# Altium PCB TMC2100 V1.3.PcbDoc
Units mil, origin at the board's own origin, x right, y up, seen from the top; angles counter-clockwise.
Board outline 600 x 800 mil, 4 copper layers (Top, Ground, Supply, Bottom), stack 62.992 mil thick; 20 components, 27 nets, 91 pads, 68 vias.
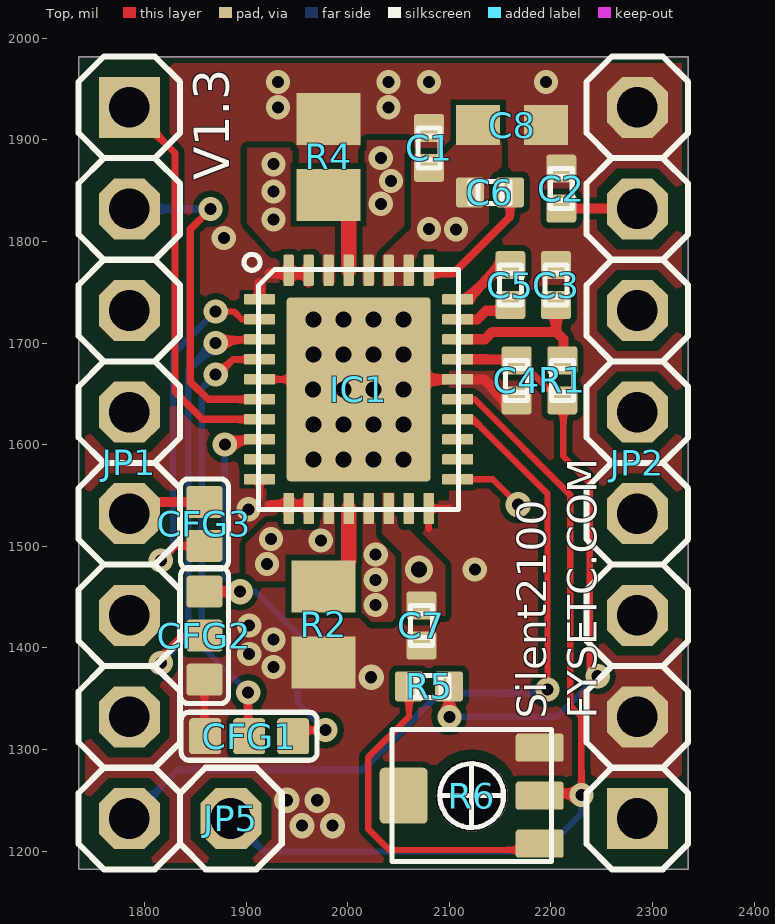
[diagram p0: Top view]
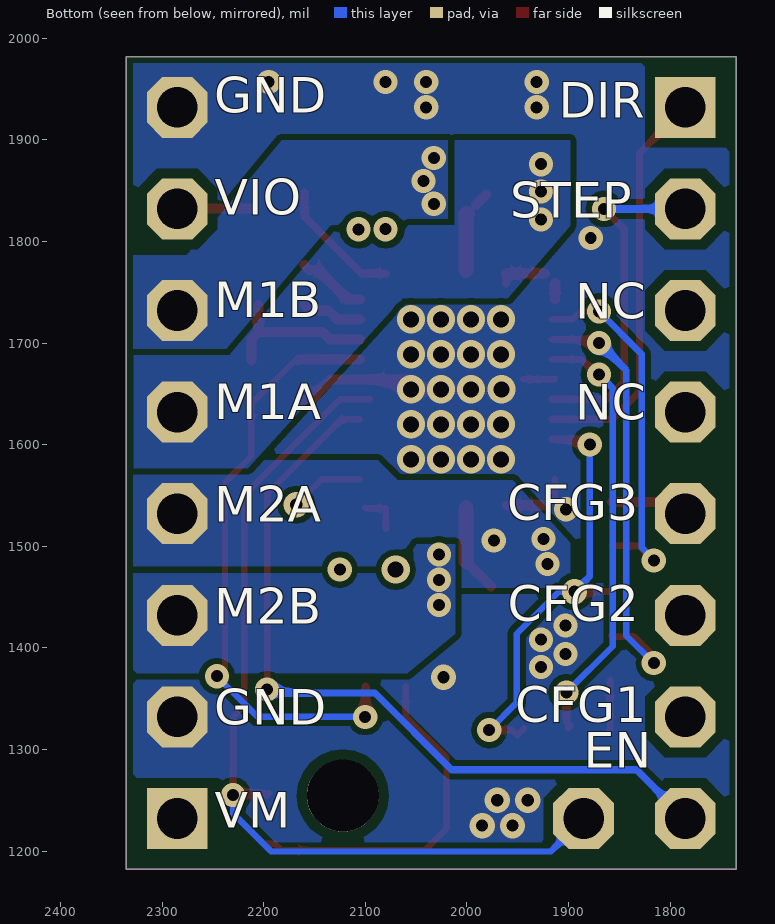
[diagram p1: Bottom view, seen from below]
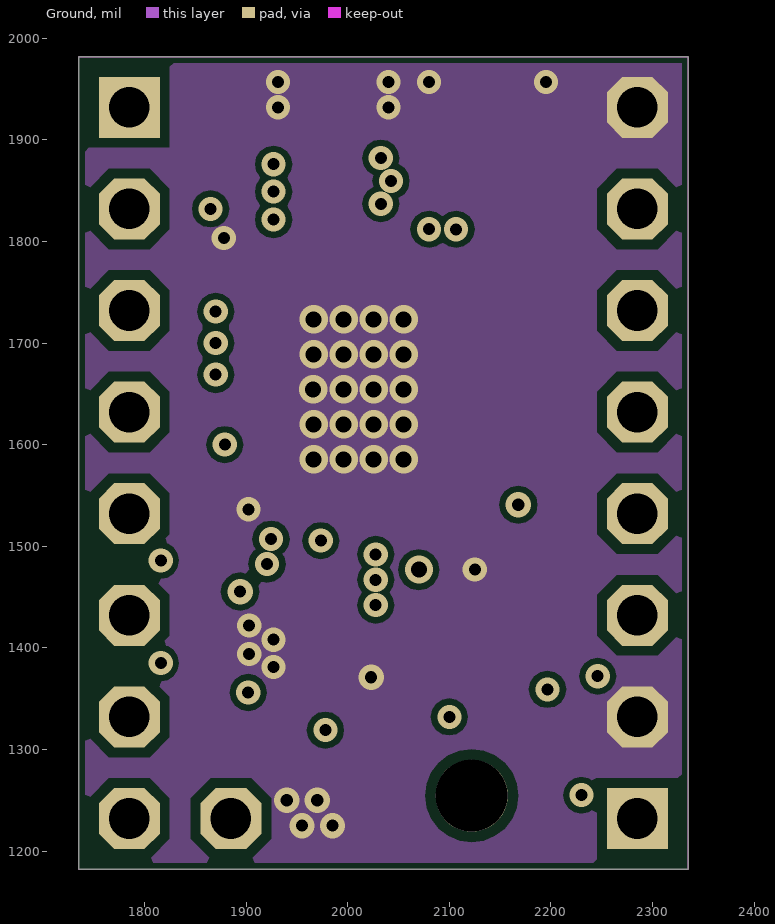
[diagram p2: Ground]
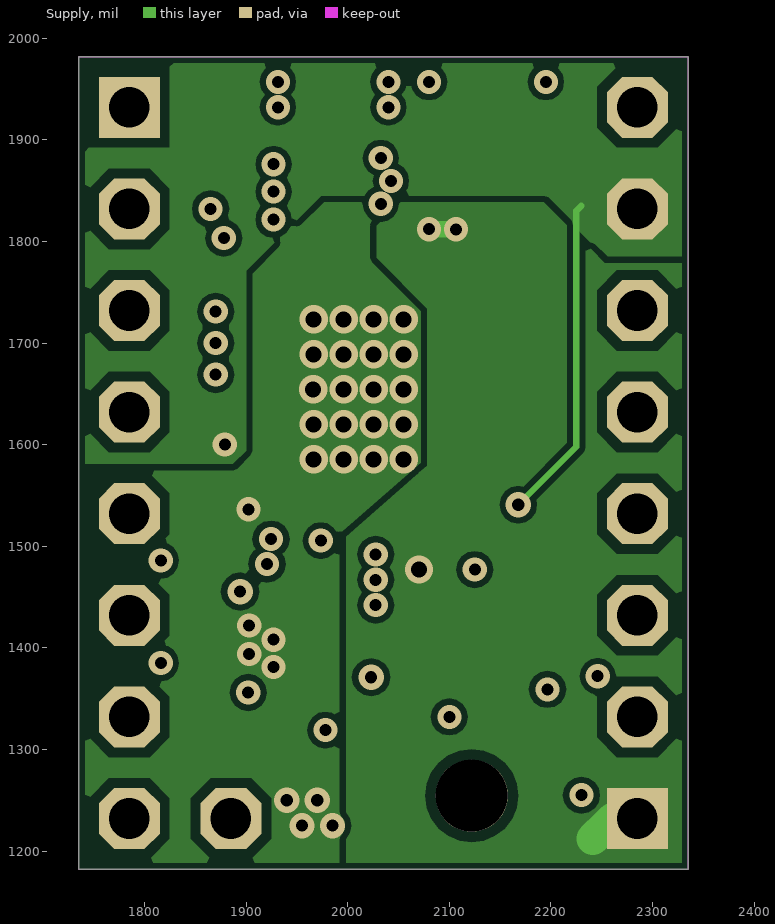
[diagram p3: Supply]

## Layer stack, top to bottom
Top Solder: solder mask 0.4, Solder Resist, Dk 3.5
Top: signal copper 1.378
Dielectric 1: prepreg 13.7795, FR-4, Dk 4.8
Ground: signal copper 1.378
Dielectric 2: core 13.7795, FR-4, Dk 4.8
Supply: signal copper 1.378
Dielectric 3: prepreg 29.9213, FR-4, Dk 4.8
Bottom: signal copper 1.378
Bottom Solder: solder mask 0.4, Solder Resist, Dk 3.5

## Board outline
1735,1182 2335,1182 2335,1982 1735,1982

## Design rules (kind name [scope] priority, off if disabled: settings)
Clearance [All] p1: gap=6 except(10: THPad-Poly)
Clearance "Clearance (Same Net)" [All] p2: gap=0
HoleSize HoleSize_1 [All] p1: absolutevalues=TRUE maxlimit=100000 minlimit=9.84 maxpercent=80.000 minpercent=20.000
HoleSize [All] p2: absolutevalues=TRUE maxlimit=100 minlimit=1 maxpercent=80.000 minpercent=20.000
HoleToHoleClearance mdViaViaSameLayer [All] p1: gap=8 allowstackedmicrovias=TRUE
HoleToHoleClearance [All] p2: gap=10 allowstackedmicrovias=TRUE
PasteMaskExpansion mlMinCreamFrame [All] p1: expansion=0
PasteMaskExpansion [All] p2: expansion=0
PolygonConnect ThermalVias [IsVia] p1: connectstyle=Direct reliefconductorwidth=10 reliefentries=4 polygonreliefangle="90 Angle" airgapwidth=10
PolygonConnect [All] p2: connectstyle=Direct reliefconductorwidth=10 reliefentries=4 polygonreliefangle="90 Angle" airgapwidth=10
RoutingVias [All] p1: holewidth=12 width=25 viastyle="Through Hole" minholewidth=10 minwidth=20 maxholewidth=28 maxwidth=50
SilkToSilkClearance [All] p1 off: silktosilkclearance=10
SilkToSolderMaskClearance [IsPad] p1 off: minsilkscreentomaskgap=10 clearancetoexposedcopper=TRUE
SolderMaskExpansion mlMinStopFrame [All] p1: expansion=2
SolderMaskExpansion [All] p2: expansion=4
Width Width_1 [All] p1: maxlimit=100000 minlimit=5.91 preferedwidth=10
Width [All] p2: maxlimit=10 minlimit=10 preferedwidth=10
25 further rules are at their usual default settings.

## Components (designator, comment, footprint, x,y, rotation, side; value= is the part's Value field where it differs from the comment)
C1 "100n/50V" C0402 2080,1892 r180 top
C2 "100n/50V" C0402 2210.17,1852 r0 top
C3 "470n/10V" C0402 2205,1757 r0 top
C4 "4u7/10V" C0402 2166.25,1663.25 r180 top
C5 "22n/50V" C0402 2160,1757 r180 top
C6 "100n/50V" C0402 2140,1848.25 r90 top
C7 "100n/50V" C0402 2072.5,1422 r0 top
C8 "" C0603 2161.85,1914.43 r0 top
CFG1 "" JUMPER3-0402 1903,1313 r90 top
CFG2 "" JUMPER3-0402 1859,1412 r180 top
CFG3 "" JUMPER2-0402 1859,1522 r180 top
IC1 "TMC2100-LA" WE-CHIP_QFN36-PAD 2010.75,1654.44 r0 top
JP1 "" 1X08-S 1785,1582 r270 top
JP2 "" 1X08-S 2285,1582 r90 top
JP5 "" 1X01 1885,1232 r0 top
R1 "2R2" C0402 2211.17,1663.25 r0 top
R2 "" M0805 1976.14,1423.06 r90 top
R4 "" M0805 1981.06,1883.28 r270 top
R5 "20k" C0402 2080,1362 r90 top
R6 "20k" POT_EVM3R 2122,1254.5 r90 top

## Footprints (in the part's own frame and the unit in brackets; to place one, negate y for a bottom-side part, rotate by r counter-clockwise, add the part's x,y. Pads: shape width x height; smd on the part's side, far side on the other; paste and mask are expansions set on the pad)
1X01 [mil] "1X01"
  oct 60x60 hole 40: 1(0,0)
  silkscreen extent -50,-50 50,50
1X08-S [mil] "1X08-S"
  rect 60x60 hole 40: 1(-350,0)
  oct 60x60 hole 40: 2(-250,0) 3(-150,0) 4(-50,0) 5(50,0) 6(150,0) 7(250,0) 8(350,0)
  silkscreen extent -400,-50 400,50
C0402 [mil] "C0402"
  rrect20% 29.53x27.56 smd: 1(0,19.69) 2(0,-19.69)
  silkscreen extent -11,-20 11,20
C0603 [mm] "C0603"
  rect 1.1x1 smd: 1(-0.85,0) 2(0.85,0)
JUMPER2-0402 [mil] "JUMPER2-0402"
  rrect20% 35.43x31.5 smd: 1(0,21.65) 2(0,-21.65)
  silkscreen extent -24,-44 24,44
JUMPER3-0402 [mil] "JUMPER3-0402"
  rrect20% 35.43x31.5 smd: 1(0,43.31) 2(0,0) 3(0,-43.31)
  silkscreen extent -24,-67 24,67
M0805 [mil] "M0805"
  rect 51.18x62.99 smd: 1(-37.4,0) 2(37.4,0)
POT_EVM3R [mil] "POT_EVM3R"
  rrect20% 27.56x47.24 smd: 1(-47.24,-66.93) 2(0,-66.93) 3(47.24,-66.93)
  round 70.87 hole 70.87: 1(0,0)
  rrect20% 55.12x47.24 smd: MOUNT(0,66.93)
  silkscreen extent -65,-78 65,78
WE-CHIP_QFN36-PAD [mil]
  rrect20% 30.56x10.24 smd: 1(-97.49,88.58) 2(-97.49,68.9) 3(-97.49,49.21) 4(-97.49,29.53) 5(-97.49,9.84) 6(-97.49,-9.84) 7(-97.49,-29.53) 8(-97.49,-49.21) 9(-97.49,-68.9) 10(-97.49,-88.58) 19(97.49,-88.58) 20(97.49,-68.9) 21(97.49,-49.21) 22(97.49,-29.53) 23(97.49,-9.84) 24(97.49,9.84) 25(97.49,29.53) 26(97.49,49.21) 27(97.49,68.9) 28(97.49,88.58)
  rrect20% 10.24x30.56 smd: 11(-68.9,-117.17) 12(-49.21,-117.17) 13(-29.53,-117.17) 14(-9.84,-117.17) 15(9.84,-117.17) 16(29.53,-117.17) 17(49.21,-117.17) 18(68.9,-117.17) 29(68.9,117.17) 30(49.21,117.17) 31(29.53,117.17) 32(9.84,117.17) 33(-9.84,117.17) 34(-29.53,117.17) 35(-49.21,117.17) 36(-68.9,117.17)
  rrect5% 141.74x181.1 smd: TP(0,0)
  silkscreen extent -113,-118 98,133

## Part data
C1 C2 C3 C4 C5 C6 C7 R1 R5: library part C0402
C8: library part C0603
CFG1 CFG2: library part JUMPER3-0402
CFG3: library part JUMPER2-0402
IC1: library part QFN36-PAD
JP1 JP2: library part 1X08-S
JP5: library part 1X01
R2 R4: library part M0805
R6: library part POT_EVM3R

## Via types
v1: diameter 23.81/23.81/23.81/23.81 (per signal layer), hole 11.81, Top to Bottom, tented both sides, 40 vias
v2: diameter 27.75/27.75/27.75/27.75 (per signal layer), hole 15.75, Top to Bottom, 20 vias
v3: diameter 25, hole 12, Top to Bottom, tented both sides, 7 vias
v4: diameter 27.75/27.75/27.75/27.75 (per signal layer), hole 15.75, Top to Bottom, tented both sides, 1 vias

## Nets (pads, with @x,y where several pads share a name; then routed paths per layer and width w, separated by ;. In a path a pad name is that pad's centre, name@x,y a point inside that pad or via, vN(x,y) a via of type N, cw(c..) or ccw(c..) an arc to the next point about the centre after c; other vN are vias at no path point)
+5V: C4.2 IC1.25 R1.2 R5.2 | length 592.1
  Top w6.3: C4.2 2167.19,1682 2170,1682 2208.44,1643.57 2212.17,1643.57 2212.17,1588.58 2238,1562.75 2238,1380.04 v1(2246,1372.04)
  Top w7.87: v1@2099.69,1341.69 R5.2
  Top w9.84: IC1.25@2105.24,1683.97 2165.22,1683.97 C4.2
  Bottom w6.3: v1(2100,1332) 2205.96,1332 v1(2246,1372.04)
BRA: IC1.33 R4.2 | length 69.6
  Top w10: R4.2 R4.2@1990.91,1836.04
  Top w15: IC1.33 R4.2@2000.91,1826.03
  Top w16: R4.2@2000,1826.94 R4.2@2000.91,1826.03
BRB: IC1.14 R2.2 | length 90.1
  Top w10: R2.2 R2.2@2000.91,1485.23 ; IC1.14 IC1.14@2000.91,1540.27
  Top w15: R2.2@2000.91,1485.23 IC1.14
CFG1: CFG1.2 IC1.4 | length 428.9
  Top w6.3: v1@1877,1666 1877,1674 1886.97,1683.97 IC1.4@1916.26,1683.97 ; CFG1.2@1900,1321 1898,1323 1902,1327 v1(1902,1356)
  Top w10: v1(1902,1356) v1@1903,1355
  Bottom w6.3: v1(1870,1669) 1856.3,1655.3 1856.3,1401.7 v1(1902,1356) ; v1@1876,1666 v1@1877,1666
CFG2: CFG2.2 IC1.3 | length 433.1
  Top w6.3: v1(1816,1385) 1816,1392 1835,1411 1856.75,1411 CFG2.2@1857.75,1412 ; v1@1877.65,1703.65 IC1.3@1916.26,1703.65
  Bottom w6.3: v1(1816,1385) 1843,1412 1843,1673.19 1869.81,1700 v1(1870,1700)
CFG3: CFG3.1 IC1.2 | length 363.9
  Top w6.3: v1(1816,1486) 1830.35,1500.35 CFG3.1@1857,1500.35 ; v1(1870,1731) 1888,1731 1895.66,1723.34 IC1.2@1916.26,1723.34
  Bottom w6.3: v1(1816,1486) 1816,1487 1828,1499 1828,1689.19 1869.81,1731 v1(1870,1731)
CFG6: IC1.22 JP1.8 | length 778.5
  Top w6.3: IC1.22@2105.24,1624.91 2123.34,1624.91 2196.58,1551.67 v1(2196.58,1359.08)
  Bottom w7.09: JP1.8 1833,1280 2015,1280 2090.5,1355.5 2193,1355.5 v1(2196.58,1359.08)
CFG-1: JP1.7
CFG-2: JP1.6
CFG-3: CFG3.2 JP1.5 | length 76.8
  Top w10: JP1.5 1796.65,1543.65 CFG3.2@1857,1543.65
CPI: C5.2 IC1.28 | length 68.7
  Top w7.09: C5.2@2153.35,1772 C5.2@2155.32,1772
  Top w9.84: IC1.28@2105.24,1743.02 2117.27,1743.02 2146.25,1772 C5.2@2153.35,1772 ; C5.2@2155.32,1772 C5.2
CPO: C5.1 IC1.27 | length 60.6
  Top w9.84: IC1.27@2105.24,1723.34 2127.59,1723.34 2136.25,1732 2154.69,1732 C5.1
DIAG0: IC1.20
DIAG1: IC1.21
DIR: IC1.7 JP1.1 | length 396.1
  Top w7.09: JP1.1 1830,1887 1830,1652 1857.09,1624.91 IC1.7@1916.26,1624.91
GND: C1.2 C2.1 C3.1 C4.1 C7.2 C8.2 CFG1.1 CFG2.1 IC1.1 IC1.5 IC1.10 IC1.11 IC1.12 IC1.18 IC1.24 IC1.35 IC1.36 IC1.TP JP2.2 JP2.8 R2.1 R4.1 R6.3 | length 417.4
  Top w6.3: CFG2.1 1859,1319.69 CFG1.1@1859.69,1319 ; 1913,1548 1913.26,1548.26 IC1.10 ; IC1.5 IC1.TP@1945,1664.28 ; 2079.65,1517.31 IC1.18 2099.27,1537.27 2100,1538
  Top w7.09: IC1.12@1960.63,1540.27 IC1.12@1961.54,1541.17
  Top w7.87: IC1.35@1961.54,1758.77 IC1.35@1961.54,1768.61 ; IC1.TP v2(2055.04,1654.44)
  Top w9.84: 1923.1,1540.27 IC1.12@1960.63,1540.27 ; 1923.1,1768.61 IC1.35@1961.54,1768.61 ; v2(2055.04,1654.44) 2055.04,1664.28 2133.97,1664.28 2153.75,1644.5 2165.32,1644.5 C4.1
  Top w10: 1913,1759 1913.26,1758.74 IC1.1
  other v1: 1927,1381 1903,1394 1927,1408 1903,1422 2125,1477 1902.32,1536.33 1878.03,1803.32 1931.25,1932 2040,1932 1931.25,1957 2040,1957 2080,1957 2195,1957
  other v2: 1966.46,1585.54 1995.98,1585.54 2025.51,1585.54 2055.04,1585.54 1966.46,1619.99 1995.98,1619.99 2025.51,1619.99 2055.04,1619.99 1965.98,1654.44 1995.98,1654.44 2025.51,1654.44 1966.46,1688.89 1995.98,1688.89 2025.51,1688.89 2055.04,1688.89 1966.46,1723.34 1995.98,1723.34 2025.51,1723.34 2055.04,1723.34
  other v3: 1955,1225 1985,1225 1940,1250 1970,1250 2023,1371
IREF: IC1.23 JP5.1 R6.2 | length 896.9
  Top w6.3: IC1.23@2095.33,1644.5 IC1.23@2105.33,1644.5 ; IC1.23@2107.5,1644.5 IC1.23@2105.33,1644.5 ; R6.2@2194.43,1257 R6.2@2196.93,1254.5 ; R6.2@2198.43,1256 R6.2@2196.93,1254.5 ; R6.2@2199.43,1257 R6.2@2196.93,1254.5 ; v1@2230,1257 2230,1332 2219,1343 2219,1550.5 2124.9,1644.6 2105.24,1644.6 IC1.23@2105.33,1644.5
  Top w7.09: R6.2@2199.43,1257 v1@2230,1257
  Bottom w6.3: JP5.1 1917.5,1199.5 2192.5,1199.5 2230,1237 v1@2230,1257
  other v1: 2230,1255
OA1: IC1.34 JP2.5
  other v1: 1927.01,1821.49 1927.01,1848.99 1927.01,1875.98
OA2: IC1.32 JP2.6
  other v1: 2032.54,1837 2042.5,1859.5 2032.54,1882
OB1: IC1.13 JP2.4
  other v1: 1920.5,1482.5 1973.5,1505.5 1924.5,1507
OB2: IC1.15 JP2.3
  other v1: 2027.5,1442 2027.5,1467 2027.5,1492
STEP: IC1.6 JP1.2 | length 336.8
  Top w7.09: v1(1865,1832) 1845,1812 1845,1662 1862.4,1644.6 IC1.6@1916.26,1644.6
  Bottom w7.87: JP1.2 v1(1865,1832)
VCC: C3.2 IC1.26 R1.1 | length 160.2
  Top w9.84: IC1.26@2105.24,1703.65 2134.95,1703.65 2142.33,1711.04 2204.98,1711.04 ; C3.2 2205,1711.06 ; R1.1@2212.17,1682.94 2212.17,1703.85 2204.98,1711.04
VCP: C6.2 IC1.29 | length 127.1
  Top w7.87: IC1.29@2079.65,1768.61 2104.11,1768.61 2159.69,1824.19 C6.2
VIO: C2.2 CFG1.3 CFG2.3 IC1.8 IC1.19 JP2.7 | length 909.6
  Top w6.3: CFG2.3 v3(1894,1455.31) ; CFG1.3@1943.31,1321 1950.31,1314 1955.31,1319 v1(1978,1319) ; IC1.19@2105.24,1565.86 2142.86,1565.86 v3(2167.86,1540.86)
  Top w7.09: v1@1878.23,1605.23 IC1.8@1916.26,1605.23
  Top w9.84: C2.2@2212.17,1832.32 2284.69,1832.32 JP2.7
  Supply w6.3: v3(2167.86,1540.86) 2225,1598 2225,1830 2230,1835
  Bottom w6.3: v1(1879,1600) 1879,1470.31 v3(1894,1455.31) 1909.47,1455.31 1950.78,1414 1950.78,1346.22 v1(1978,1319)
VM: C1.1 C6.1 C7.1 C8.1 IC1.16 IC1.30 IC1.31 JP2.1 | length 54.9
  Supply w16: v1(2080,1812) 2106.48,1812 v1(2106.56,1811.92)
  Supply w32: 2241.25,1212 JP2.1@2261.25,1232
  other v4: 2070,1477
VREF1: R5.1 R6.1@2188.93,1207.26 | length 344.9
  Top w6.3: R5.1 2060.31,1332.31 2020,1292 2020,1222 2041,1201 2182.67,1201 2188.93,1207.26 R6.1@2196.93,1207.26
pads on no net: IC1.9 IC1.17 JP1.3 JP1.4 R6.1@2122,1254.5 R6.MOUNT

## Polygon pours and split planes (outlines as drawn)
VM on Top "Top-VM" (solid, remove dead copper, pour order 0): 2033.85,1756.36 2033.84,1785.68 2062.32,1812.77 2062.32,1885.93 2095.87,1885.93 2114.94,1905 2144,1905 2151.43,1897.56 2151.43,1874.12 2138.93,1861.62 2138.93,1811.62 2117.88,1790.57 2074.13,1790.57 2065.53,1781.96 2065.53,1756.36
VM on Top "Top-VM 1" (solid, remove dead copper, pour order 2): 2033.85,1552.53 2033.85,1512.44 2053.26,1493.03 2053.26,1431.51 2095.72,1431.51 2095.72,1481.21 2046.47,1530.54 2046.47,1552.53
GND on Top "Top-GND 1" (solid, remove dead copper, pour order 12): 1931.07,1973.43 1931.07,1903.07 2017.88,1903.07 2032.68,1917.87 2032.68,1973.43
GND on Top "Top-GND 2" (solid, remove dead copper, pour order 14): 1928.57,1345.57 2061.41,1345.57 2061.89,1414.97 2025.09,1414.97 2011.63,1428.43 1928.57,1428.43
OA1 on Top "Top-OA1" (solid, remove dead copper, pour order 18): 1987.49,1756.36 1987.49,1820.78 1945.55,1820.78 1945.55,1892.13 1900.88,1892.13 1900.88,1817.73 1928.82,1787.13 1974.87,1787.13 1974.87,1756.36
OA2 on Top "Top-OA2" (solid, remove dead copper, pour order 22): 2058.81,1813.14 2058.82,1899.52 2016.58,1899.52 2016.58,1820.92 2014.32,1821 2014.32,1754.47 2026.43,1759.34 2026.43,1782.35
OB2 on Top "Top-OB2" (solid, remove dead copper, pour order 26): 2053.72,1425.45 2053.94,1496.12 2026.23,1523.83 2026.23,1552.53 2014.47,1552.53 2014.47,1522.04 2008.6,1516.16 2006.9,1425.45
OB1 on Top "Top-OB1" (solid, remove dead copper, pour order 30): 1988.93,1465.57 1988.93,1554.68 1974.82,1554.68 1974.82,1527.38 1970.87,1523.43 1920.87,1523.43 1899.82,1502.38 1899.82,1465.57
GND on Top "Keep-Out Layer-No Net" (solid, remove dead copper, pour order 44): 2335,1182 1735,1182 1735,1982 2335,1982
VM on Supply "Supply-VM" (solid, remove dead copper, pour order 4): 2335,1182 1998.31,1182 1998.31,1509.4 2078.31,1579.4 2078.31,1733.96 2028.31,1783.96 2028.31,1838.69 2193.04,1838.69 2253.04,1778.69 2335,1778.69
VIO on Supply "Keep-Out Layer-No Net" (solid, remove dead copper, pour order 36): 1735,1982 1735,1581 1887,1581 1899,1593 1900,1594 1900,1771 1974,1845 2193,1845 2260,1778 2335,1778 2335,1982
GND on Supply "Keep-Out Layer-No Net" (solid, remove dead copper, pour order 38): 1927.01,1848.99 1900,1821.98 1900,1796.36 1900,1594 1887,1581 1886,1580 1735,1580 1735,1182 1736,1181 1999,1181 1999,1509.44 2003.56,1514 2078.31,1588.75 2078.31,1733.96 2028.31,1783.96 2028,1784.27 2028,1849
OA1 on Bottom "Bottom-OA1" (solid, remove dead copper, pour order 20): 2215.54,1576.68 2339.32,1576.68 2339.32,1687.9 2233.88,1687.9 2125.61,1815.86 2012.07,1815.86 2012.07,1899.52 1898.38,1899.52 1898.38,1815.38 1959.49,1744.09 2062.91,1744.09
OA2 on Bottom "Bottom-OA2" (solid, remove dead copper, pour order 24): 2339.32,1689.88 2230.27,1689.88 2122,1812.9 2011.58,1812.9 2011.58,1899.67 2182.07,1899.67 2275.73,1786.33 2339.32,1786.33
OB2 on Bottom "Bottom-OB2" (solid, remove dead copper, pour order 28): 2339.32,1473.63 2339.32,1374.83 2058.46,1374.92 2011.58,1413.91 2011.58,1502.14 2053.05,1502.19 ccw(c2192.25,1487.64) 2052.99,1473.63
OB1 on Bottom "Bottom-OB1" (solid, remove dead copper, pour order 32): 2339.43,1584.56 2336.73,1478.18 2062.22,1478.18 2059.95,1497.94 2014.53,1497.94 2014.53,1459.2 1898.38,1459.2 1898.38,1503.41 1954.65,1564.8 2067.94,1564.8 2087.7,1584.56
GND on Bottom "Keep-Out Layer-No Net" (solid, remove dead copper, pour order 40): 1735,1982 1735,1182 2335,1182 2335,1982
GND on Ground "Keep-Out Layer-No Net" (solid, remove dead copper, pour order 42): 2335,1182 1735,1182 1735,1982 2335,1982

## Keep-outs
Keep-Out Layer:
  the board outline again, w0

## Other copper
Top:
  pour cut-out: 1920,1759.34 1920,1545 2100,1545 2100,1759.34
  pour cut-out: 1893.3,1752.22 1893.3,1733.82 1933.26,1733.82 1933.26,1752.22
  pour cut-out: 1970.74,1788.57 1952.34,1788.57 1952.34,1748.61 1970.74,1748.61
  pour cut-out: 1951.05,1788.57 1932.65,1788.57 1932.65,1748.61 1951.05,1748.61
  pour cut-out: 1933.22,1556.66 1933.22,1575.06 1893.26,1575.06 1893.26,1556.66
  pour cut-out: 1932.65,1517.31 1951.05,1517.31 1951.05,1557.27 1932.65,1557.27
  pour cut-out: 1952.34,1517.31 1970.74,1517.31 1970.74,1557.27 1952.34,1557.27
  pour cut-out: 2070.45,1517.31 2088.85,1517.31 2088.85,1557.27 2070.45,1557.27
  pour cut-out: 2363.8,1551.04 2382.2,1551.04 2382.2,1591 2363.8,1591

## Silkscreen, mask and mechanical layers (free items; w line width, h text height)
Top Overlay:
  text "V1.3" at 1895,1860 h60 r90
  text "Silent2100 / FYSETC.COM" at 2255,1330 h50 r90
Bottom Overlay:
  text "GND" at 2248.38,1915 h60
  text "DIR" at 1909.44,1910 h60
  text "VIO" at 2248.32,1814.54 h60
  text "STEP" at 1957.39,1811.38 h60
  text "M1B" at 2248.38,1713.42 h60
  text "NC" at 1893.23,1712.09 h60
  text "NC" at 1893.23,1612.81 h60
  text "M1A" at 2248.38,1612.96 h60
  text "CFG3" at 1960,1513.52 h60
  text "M2A" at 2248.38,1512.5 h60
  text "CFG2" at 1959.61,1414.24 h60
  text "M2B" at 2248.38,1412.05 h60
  text "CFG1" at 1952.56,1314.95 h60
  text "GND" at 2248.38,1312.25 h60
  text "EN" at 1885,1270 h60
  text "VM" at 2248.32,1211.13 h60
Bottom Solder:
  region: 1961,1737 ccw(c1961,1727) 1951,1727 1951,1582 ccw(c1961,1582) 1961,1572 2061,1572 ccw(c2061,1582) 2071,1582 2071,1727 ccw(c2061,1727) 2061,1737
Dimension:
  the board outline again, w0
Document:
  text "Dir" at 1620.81,1906.43 h86.8
  text "GND" at 2355,1902 h47.6
  text "Step" at 1561.87,1820.89 h86.8
  text "Vio - 3.3-5V" at 2355,1802 h47.6
  text "nc" at 1638.8,1721.69 h86.8
  text "Motor Coil 1-B" at 2355,1702 h47.6
  text "nc" at 1638.8,1621.69 h86.8
  text "Motor Coil 1-A" at 2355,1602 h47.6
  text "CFG3" at 1515.29,1506.43 h86.8
  text "Motor Coil 2-A" at 2355,1502 h47.6
  text "CFG2" at 1515.86,1406.43 h86.8
  text "Motor Coil 2-B" at 2355,1402 h47.6
  text "CFG1" at 1526.05,1306.43 h86.8
  text "GND" at 2355,1302 h47.6
  text "En/CFG6" at 1400.95,1206.43 h86.8
  text "Vm" at 2355,1202 h47.6
  text "VRef" at 1894.78,1036.98 h62 r90
  text "DIAG1" at 1999.72,1009.95 h62 r90
  text "DIAG0" at 1949.72,1002.37 h62 r90
Unrouted:
  lines w0: 1787.5,1234.5 2010.5,1342 ; 1870,1597 1857.75,1455.31 1943.31,1321 ; 1916.26,1605.23 2105.24,1565.86 ; 1916.26,1664.28 1965.98,1654.44